# Allegro board PBPRE.brd
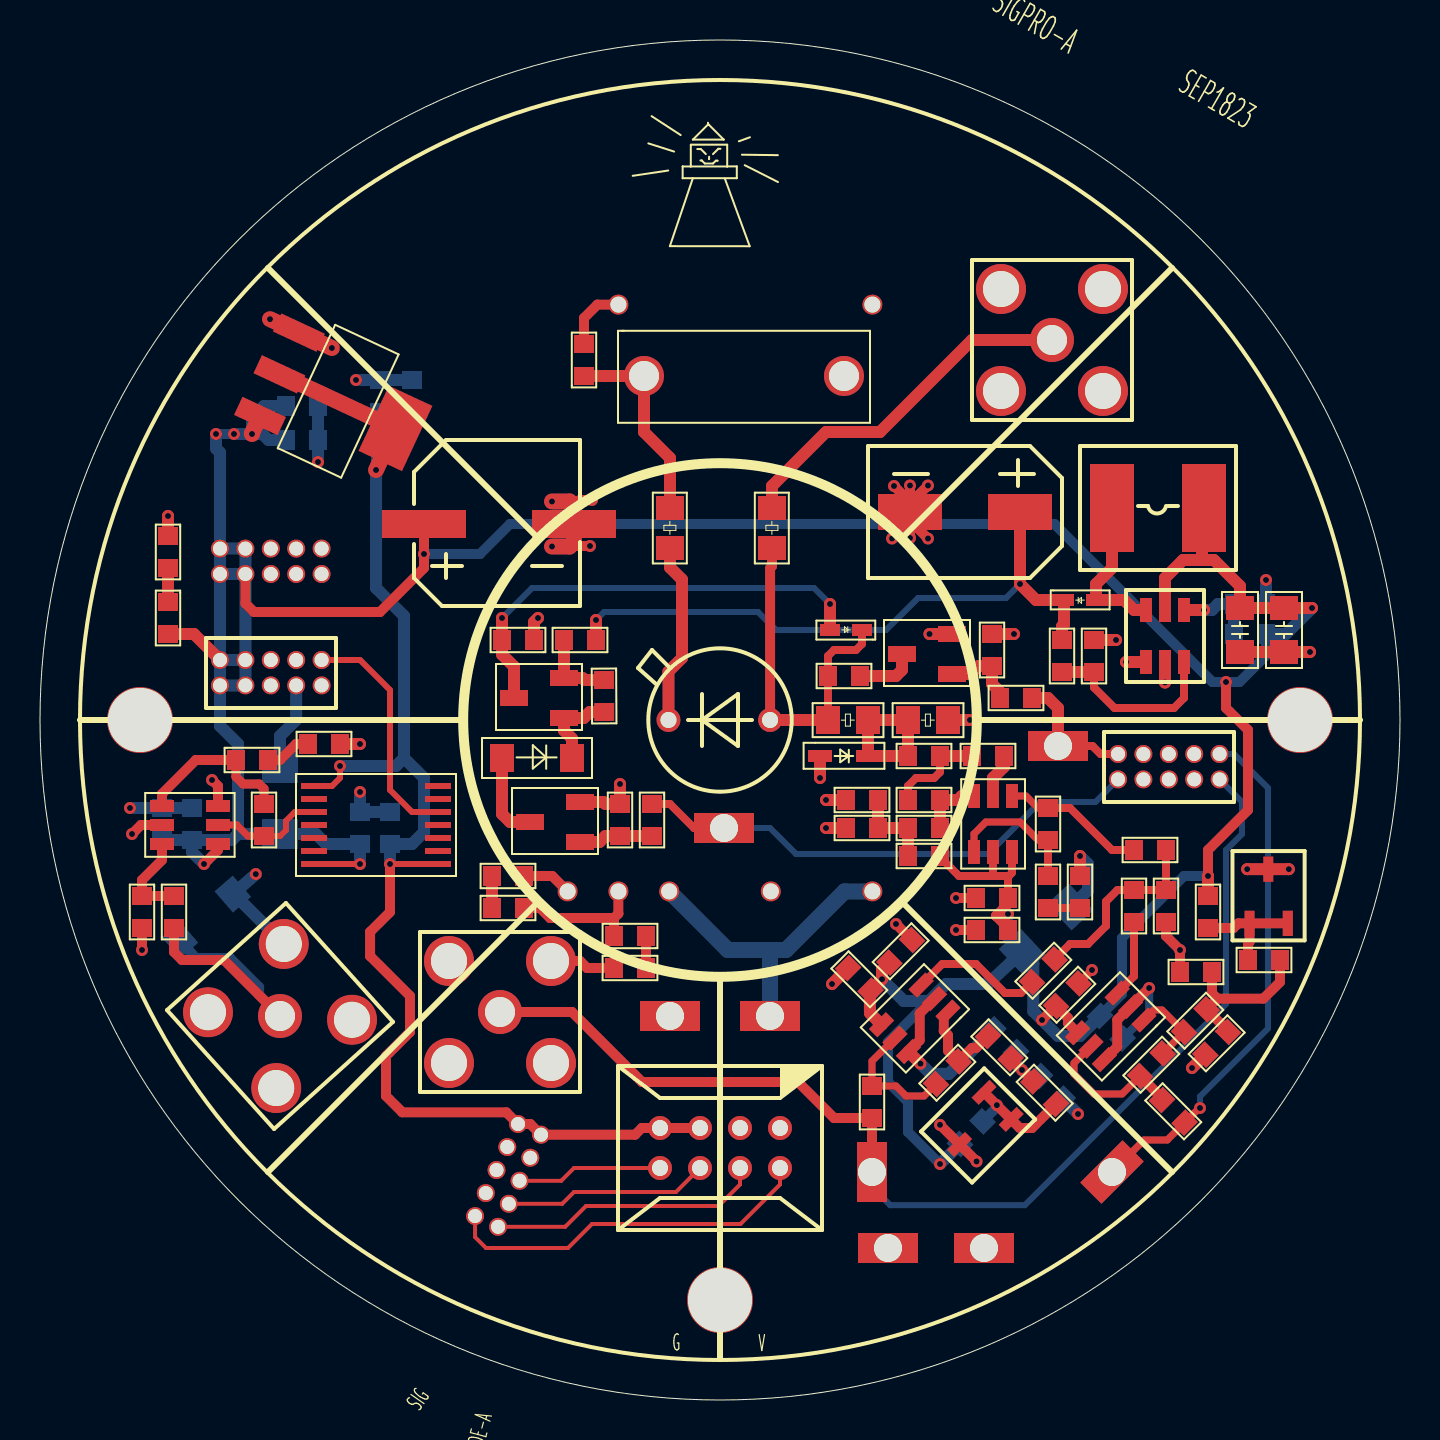
[diagram p0: board, top side]
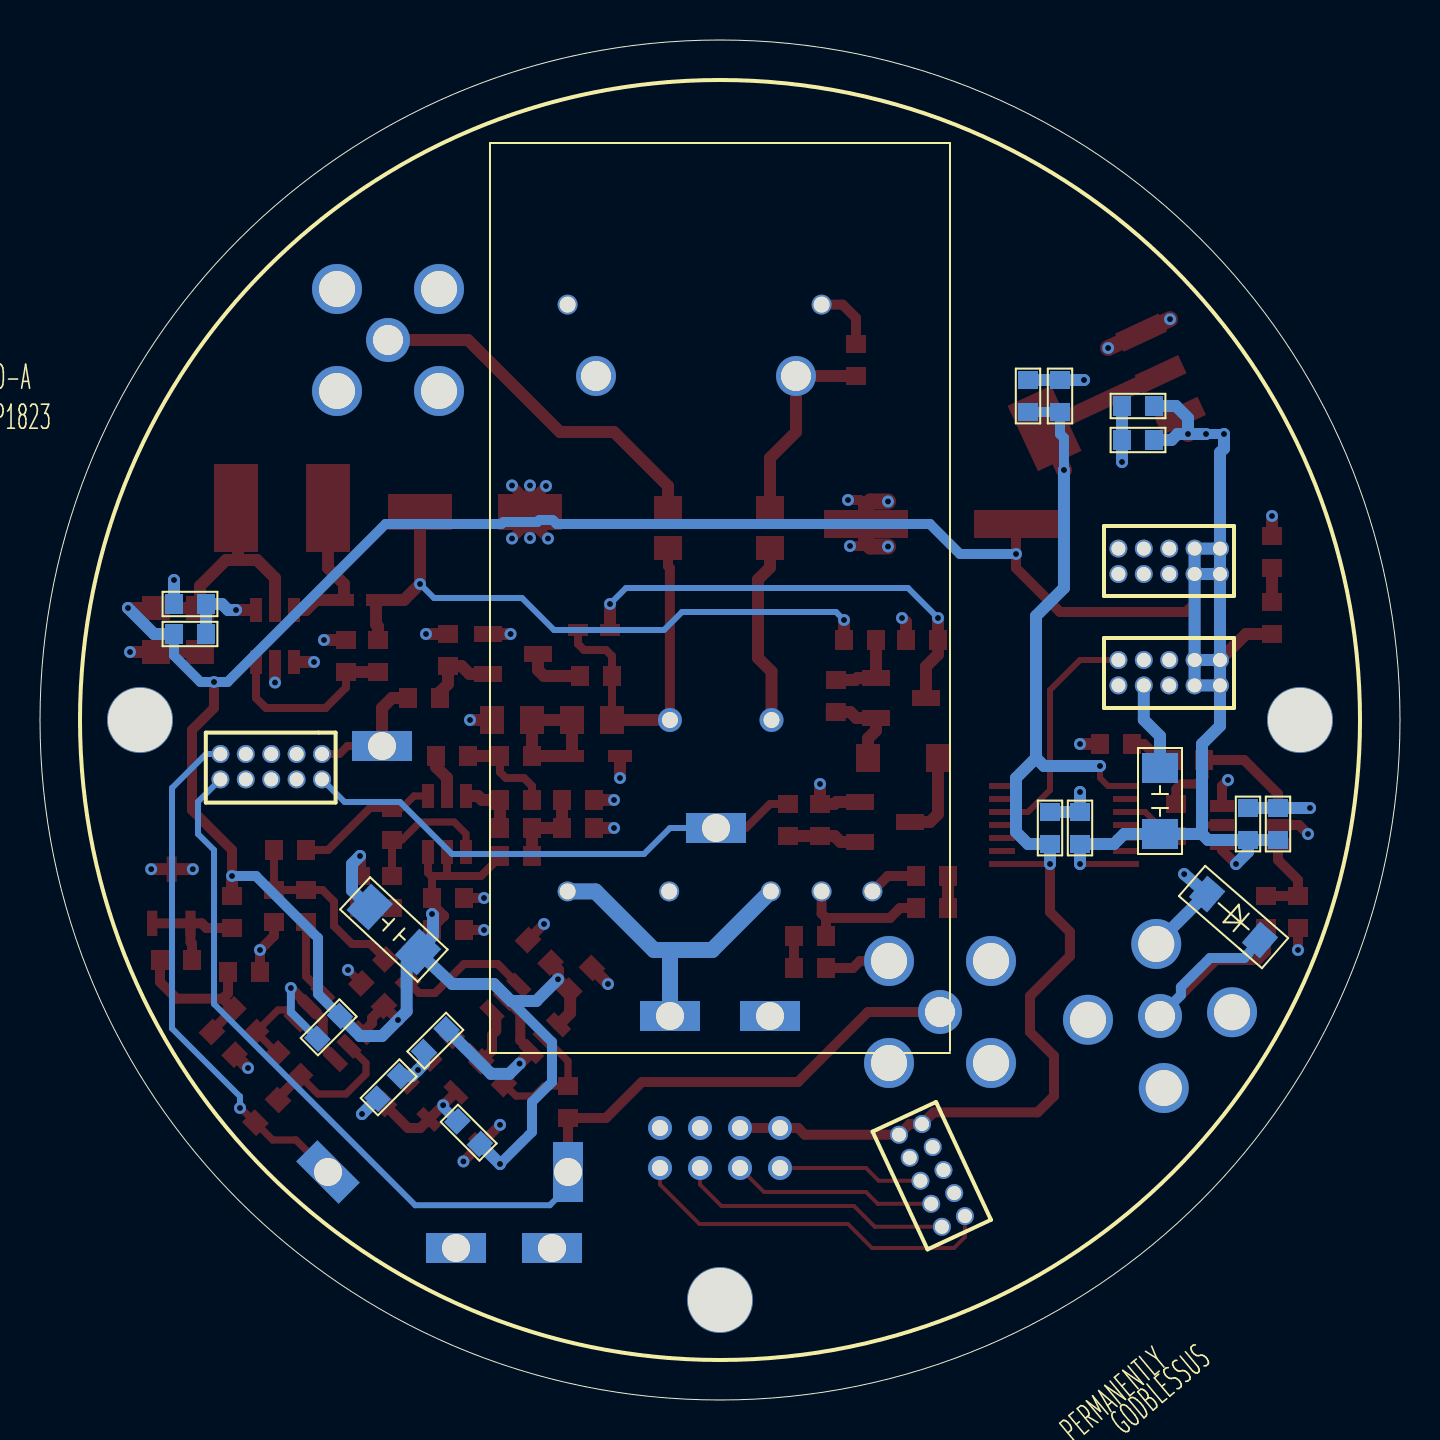
[diagram p1: board, bottom side, seen from below]

Outline 68 x 68 mm; copper layers: TOP, BOTTOM. Coordinates in mm from the lower left corner of the outline.
Outline path: circle c34,34 r34

## Design rules (mm)
constraint set DEFAULT: min track width 0.152, pair gap 0.152

## Placement (name value [footprint] x y rotation side)
C7  10uF/35V  [C0805]  60 39.6 270 top
C8  10uF/35V  [C0805]  62.2 39.6 270 top
C9  220uF/35V  [CAP-SMD-D8D0-L8D3-W8D3-P7D5]  19.2 43.8 0 top
C10  10uF/16V  [C0603]  43.6 23 225 top
C11  0.1uF/16V  [C0603]  45 32.2 180 top
C12  0.1uF/16V  [C0603]  45 30 180 top
C13  0.1uF/16V  [C0603]  48.8 17.4 135 bottom
C14  0.1uF/16V  [C0603]  40.4 21.6 315 top
C15  0.1uF/16V  [C0603]  41.9 30 180 top
C16  0.1uF/16V  [C0603]  52 24.6 90 top
C17  0.1uF/16V  [C0603]  48.4 25.1 180 top
C18  10uF/16V  [C0603]  48.4 23.5 180 top
C19  0.1uF/16V  [C0603]  56.3 27.5 180 top
C20  0.1uF/16V  [C0603]  53 19.2 315 bottom
C21  100uF/35V  [CAP-SMD-L6D6-W6D6-P5D5-MM]  49 44.4 180 top
C22  10uF/16V  [C0603]  50.8 19.7 45 top
C23  0.1uF/16V  [C0603]  59.4 18.4 225 top
C24  0.1uF/630V  [MPP472J630V]  30.2 51.2 0 top
C25  10uF/16V  [C0603]  6.1 29.6 270 bottom
C26  0.1uF/16V  [C0603]  7.6 29.6 270 bottom
C27  10uF/16V  [C0603]  12.3 49.7 0 bottom
C28  0.1uF/16V  [C0603]  12.3 48 0 bottom
C29  10uF/16V  [C0603]  17 51 270 bottom
C30  0.1uF/16V  [C0603]  18.6 51 270 bottom
C64  0.1uF/16V  [C0603]  17.5 29.4 270 bottom
C65  0.1uF/16V  [C0603]  16 27.8 90 bottom
C66  22uF/10V  [C1206]  49.1 22.4 43 bottom
C67  22uF/10V  [C1206]  12 28.3 90 bottom
D2  LED  [R0603]  6.4 43.2 270 top
D3  SAPD  [SAPD-THR-2P]  34 34 180 top
D4  PTVSLC3D3V3B  [SOD323-L1D8-W1D3-P2D4-MM]  39 32.2 0 top
D5  BAS521-7  [SOD-523-L1D2-W0D8-P1D6-MM]  51.2 40 0 top
D6  BAS521-7  [SOD-523-L1D2-W0D8-P1D6-MM]  41.1 38.5 180 top
D7  MMSZ12T1G  [SOD-123-L2D8-W1D8-P3D5-MM]  26.6 32.1 180 top
D8  BAS521-7  [SOD-123-L2D8-W1D8-P3D5-MM]  7 23 41 bottom
J1  Conn-2x5  [CONN-2X5-1D27]  9 37 0 top
J2  Conn-2x5  [CONN-2X5-1D27]  53.9 32.3 0 top
J3  Conn-2x5  [CONN-2X5-1D27]  9 41.3 0 bottom
J4  Conn-2x5  [CONN-2X5-1D27]  23.9 13.8 245 bottom
J7  SMA  [SMA-THR-4P]  50.6 53 0 top
J8  SMA  [SMA-THR-4P]  12 19.2 312 top
J9  PHB-2.0mm-2x4P-Male  [PHB-2D0MM-2X4P]  37 11.6 180 top
J10  SMA  [SMA-THR-4P]  23 19.4 90 top
L3  47uH/1A  [IND-SMD-L5D0-W5D0-P4D6-MM]  58.2 44.6 180 top
NOREF  -  []  15.5 39.85 90 top
NOREF#2  -  []  3.87 44.79 0 top
NOREF#3  -  []  27.95 51.2 0 top
NOREF#4  -  [unnamed#2]  5 34 0 top
NOREF#5  -  []  1.06 42.42 0 top
NOREF#6  -  [unnamed#2]  63 34 0 top
NOREF#7  -  [unnamed#2]  34 5 0 top
NOREF#8  -  []  19.2 43.8 0 top
NOREF#9  -  []  5 34 0 top
Q2  FH3400C  [SOT-23-3-L2D9-W1D3-P1D9-MM]  45.6 38.3 0 top
Q3  AO3401A  [SOT-23-3-L2D9-W1D3-P1D9-MM]  26.2 36.1 0 top
Q4  FH3400C  [SOT-23-3-L2D9-W1D3-P1D9-MM]  27 29.9 0 top
R8  2K  [R0603]  6.4 39.9 270 top
R11  100K  [R0805]  31.5 42.6 90 top
R13  10K  [R0603]  61.3 38.3 180 bottom
R14  DNP  [R0603]  61.3 39.8 180 bottom
R15  0  [R0805]  41.4 34 180 top
R16  0  [R0603]  41 36.2 180 top
R17  1.3K  [R0805]  45.4 34 180 top
R18  499  [R0603]  46 12.8 45 bottom
R19  10K  [R0603]  52.7 36.4 90 top
R20  4.99K  [R0603]  50 16.2 315 bottom
R21  DNP  [R0603]  44.8 15.8 45 top
R22  10K  [R0603]  50.8 14.8 135 top
R23  100  [R0603]  49.6 35.1 180 top
R24  100K  [R0603]  46.6 32.2 0 top
R25  182K  [R0603]  51.1 38 270 top
R26  100K  [R0603]  45 28.6 180 top
R27  1K  [R0603]  47.4 18.2 315 top
R28  1K  [R0603]  47.6 36.7 90 top
R29  100K  [R0603]  50.4 29.6 270 top
R30  1K  [R0603]  41.6 15.7 270 top
R31  1M  [R0603]  24.7 38 180 top
R32  10K  [R0603]  50.4 24.6 90 top
R33  0  [R0603]  49.6 20.9 45 top
R34  4.99K  [R0603]  40.3 28.6 0 top
R35  4.99K  [R0603]  43.4 27.2 0 top
R36  100  [R0603]  30.6 29.8 270 top
R37  100K  [R0603]  56.3 23.9 90 top
R38  1K  [R0603]  29 28.2 90 top
R39  0  [R0603]  54.7 23.9 90 top
R40  499  [R0603]  58.4 25.2 270 top
R41  1K  [R0603]  28.2 36 270.4 top
R42  DNP  [R0603]  55 16.2 45 top
R43  1K  [R0603]  57.2 18.4 45 top
R44  4.99K  [R0603]  58.6 21.4 180 top
R45  4.99K  [R0603]  60.4 22 0 top
R46  1K  [R0603]  56.1 15 314.9 top
R47  0  [R0603]  26.2 38 0 top
R48  0  [R0603]  24.2 26.2 180 top
R50  2K  [R0603]  27.2 51.2 90 top
R51  2.4K  [R0603]  22.6 24.6 0 top
R53  9.1K  [R0603]  30.3 23.2 180 top
R54  0  [R0603]  28.7 21.6 0 top
R55  0  [R0805]  36.6 42.6 90 top
R58  50  [R0603]  6.7 23.6 90 top
R59  50  [R0603]  5.1 25.2 270 top
R60  0  [R0603]  9.8 32 0 top
R61  0  [R0603]  13.4 32.8 0 top
R62  DNP  [R0603]  11.2 28.2 90 top
TP4  RESET  [STAMP_HOLE_1D5X3D0_1D4]  50.9 32.7 90 top
TP5  QUENCH  [STAMP_HOLE_1D5X3D0_1D4]  34.2 28.6 90 top
TP6  PULSE2  [STAMP_HOLE_1D5X3D0_1D4]  41.6 11.4 0 top
TP7  PULSE  [STAMP_HOLE_1D5X3D0_1D4]  53.6 11.4 315 top
TP8  12V  [STAMP_HOLE_1D5X3D0_1D4]  36.5 19.2 270 top
TP9  12V  [STAMP_HOLE_1D5X3D0_1D4]  31.5 19.2 270 top
TP10  PULSE  [STAMP_HOLE_1D5X3D0_1D4]  42.4 7.6 90 top
TP11  PULSE  [STAMP_HOLE_1D5X3D0_1D4]  47.2 7.6 90 top
U2  MAX5026EUT-T  [SOT23-6]  56.2 38.2 0 top
U3  TL431  [SOT-23-3-TL431]  49.2 14 135 top
U4  TLV3501AIDBVR  [SOT-23-6-L2D9-W1D6-PD0D95-CD2D8-MM]  45.4 19.4 225 top
U5  OPA357AIDBVR  [SOT-23-6-L2D9-W1D6-PD0D95-CD2D8-MM]  48.6 30.2 270 top
U6  TL431  [SOT-23-3-TL431]  60 23.4 0 top
U7  TLV3501AIDBVR  [SOT-23-6-L2D9-W1D6-PD0D95-CD2D8-MM]  55.2 19 225 top
U8  -  [H01-P401V-5C]  34 40.1 90 bottom
U9  TLV3501AIDBVR  [SOT-23-6-L2D9-W1D6-PD0D95-CD2D8-MM]  6.1 29.7 0 top
U10  AMS-1117-3.3V  [SOT-223-3]  11 49.2 155 top
U11  LSF0204PW-Q100J  [TSSOP-14]  19.9 26.8 180 top

## Library data of the parts
C7 C8 C10-C20 C22 C23 C25-C30 C64 C65 = CAP NP
C9 C21 C24 C66 C67 = C
D2 = LED
D3 D5 D6 = DIODE
D4 = DIODE SCHOTTKY
D7 D8 = DIODE ZENER
J1-J4 = Conn-2x5
J7 J8 J10 = SMA
J9 = CONNECTOR
L3 = INDUCTOR
Q2 Q4 = FH3400C
Q3 = BSP316P_0
R8 R11 R13-R48 R50 R51 R53-R55 R58-R62 = R
TP4-TP11 = T POINT F
U2 = MAX5026EUT-T
U3 U6 = TL431/TI
U4 U7 U9 = TLV3501AIDBVR
U5 = OPA357AIDBVR
U8 = H01-P401V-5C
U10 = AMS-1117-3.3V
U11 = LSF0204PW-Q100J

## Footprints (pads in the part's own frame, mm; a bottom-side part is the same pattern mirrored in y, then rotated)
C0603
  rect 0.9x1 smd: 1(0,0) 2(1.6,0)
C0805
  rect 1.2x1.4 smd: 1(0,0) 2(2.2,0)
C1206
  rect 1.5x1.8 smd: 1(0,0) 2(3.3,0)
CAP-SMD-D8D0-L8D3-W8D3-P7D5
  rect 4.2x1.4 smd: 1(0,0) 2(7.5,0)
CAP-SMD-L6D6-W6D6-P5D5-MM
  rect 3.2x1.8 smd: 1(0,0) 2(5.5,0)
CONN-2X5-1D27
  round 0.9 hole 0.7: 1(0,0) 2(0,-1.27) 3(1.27,0) 4(1.27,-1.27) 5(2.54,0) 6(2.54,-1.27) 7(3.81,0) 8(3.81,-1.27) 9(5.08,0) 10(5.08,-1.27)
H01-P401V-5C
  round 1 hole 0.8: 1(-14.67,7.62) 2(-14.67,2.54) 3(-14.67,-2.54) 4(-14.67,-5.08) 5(-14.67,-7.62) 6(14.67,-5.08) 7(14.67,7.62)
IND-SMD-L5D0-W5D0-P4D6-MM
  rect 2.2x4.4 smd: 1(0,0) 2(4.6,0)
MPP472J630V
  round 2 hole 1.5: 1(0,0) 2(10,0)
PHB-2D0MM-2X4P
  round 1.2 hole 0.8: 1(0,-2) 2(0,0) 3(2,-2) 4(2,0) 5(4,-2) 6(4,0) 7(6,-2) 8(6,0)
R0603
  rect 0.9x1 smd: 1(0,0) 2(1.6,0)
R0805
  rect 1.2x1.4 smd: 1(0,0) 2(2,0)
SAPD-THR-2P
  round 1.2 hole 0.8: 1(2.576,0) 2(-2.504,0)
SMA-THR-4P
  round 2.5 hole 1.8: 1(-2.55,2.55) 2(2.55,2.55) 3(-2.55,-2.55) 4(2.55,-2.55)
  round 2.2 hole 1.5: 5(0,0)
SOD323-L1D8-W1D3-P2D4-MM
  rect 1.2x0.6 smd: 1(0,0) 2(2.4,0)
SOD-123-L2D8-W1D8-P3D5-MM
  rect 1.2x1.4 smd: 1(0,0) 2(3.5,0)
SOD-523-L1D2-W0D8-P1D6-MM
  rect 1x0.6 smd: 1(0,0) 2(1.6,0)
SOT23-6
  rect 0.6x1.2 smd: 1(-0.9,-1.3) 2(0.05,-1.3) 3(1,-1.3) 4(1,1.3) 5(0.05,1.3) 6(-0.9,1.3)
SOT-23-3-L2D9-W1D3-P1D9-MM
  rect 1.4x0.8 smd: 1(0,-2) 2(0,0) 3(-2.5,-1)
SOT-23-3-TL431
  rect 0.51x1.27 smd: 1(0.476,0.434) 2(1.415,3.142) 3(2.391,0.434)
SOT-23-6-L2D9-W1D6-PD0D95-CD2D8-MM
  rect 1.2x0.6 smd: 1(0,0) 2(0,-0.95) 3(0,-1.9) 4(2.8,-1.9) 5(2.8,-0.95) 6(2.8,0)
SOT-223-3
  rect 2.4x1 smd: 1(0,-4.6) 2(0,-2.3) 3(0,0)
  rect 2.4x3.6 smd: 4(-6.4,-2.3)
STAMP_HOLE_1D5X3D0_1D4
  rect 1.5x3 hole 1.4: 1(0,0)
TSSOP-14
  rect 1.3x0.3 smd: 1(0,0) 2(0,-0.65) 3(0,-1.3) 4(0,-1.95) 5(0,-2.6) 6(0,-3.25) 7(0,-3.9) 8(6.2,-3.9) 9(6.2,-3.25) 10(6.2,-2.6) 11(6.2,-1.95) 12(6.2,-1.3) 13(6.2,-0.65) 14(6.2,0)
unnamed#2
  round 3.3 hole 3.2 unplated: (0,0)

## Nets
2V5: R48.1 U8.5(VREF)
GND: C7.2 C8.2 C9.2 C10.1 C13.2 C14.1 C15.2 C16.2 C17.2 C18.2 C20.2 C21.2 C22.2 C23.2 C24.2 C25.1 C26.1 C27.2 C28.2 C29.1 C30.1 C64.1 C65.2 C66.2 C67.2 D2.1(CATHODE) D4.1 D8.2 J1.5 J1.6 J1.7 J1.8 J3.7 J3.8 J3.9 J3.10 J4.3 J4.4 J7.1 J7.2 J7.3 J7.4 J8.1 J8.2 J8.3 J8.4 J9.1 J9.3 J10.1 J10.2 J10.3 J10.4 Q2.2(S) Q4.2(S) R14.1 R17.1 R19.2 R20.2 R24.2 R28.2 R31.1 R34.1 R37.1 R38.2 R44.2 R54.1 R59.2 R61.2 TP9.1(TP) TP10.1(TP) TP11.1(TP) U2.1 U2.2 U3.2 U4.2(V-) U4.6 U5.2(V-) U6.2 U7.2(V-) U7.6 U8.2 U8.7 U9.2(V-) U9.6 U10.1 U11.7 U11.11 U11.12 U11.13
VDD5: C7.1 C8.1 C9.1 C10.2 C14.2 C17.1 C18.1 C20.1 C22.1 C25.2 C26.2 C27.1 C28.1 C65.1 C66.1 C67.1 J1.1 J1.2 J1.3 J1.4 J3.1 J3.2 J3.3 J3.4 L3.1 R8.2 R13.1 R18.1 R35.2 R40.1 U2.5(VCC) U4.4 U5.5 U5.6 U7.4 U9.4 U10.3 U11.14(REFB)
VDD12: TP8.1(TP) U8.1 U8.3
VDD33: C29.2 C30.2 C64.2 J4.1 J4.2 J9.5 J9.7 U10.2 U10.4(VOUT#4) U11.1 U11.8
IO_A2: J4.5
IO_A3: J4.7
IO_A4: J4.9 J9.2
IO_H1: J4.6 J9.8
IO_J1: J4.10 J9.4
IO_J2: J4.8 J9.6
PULSE: J2.9 R46.2 TP7.1(TP)
PULSE2: J2.10 J10.5 R30.2 TP6.1(TP)
QUENCH_VOLTAGE_DOWN: J2.2 R36.1 TP5.1(TP)
RESET_DISCHARGE: J2.1 R23.1 TP4.1(TP)
VBIAS: C24.1 R11.2 R50.1
VQUENCH: C21.1 D5.1(K) R25.1 R47.2
ZERO_CROSS: R62.1 U9.5 U11.10
ZERO_CROSS_3V3: J1.9 U11.5
N365393: D5.2 L3.2 U2.6
N365573: R13.2 R14.2 U2.4
N365581: R19.1 R25.2 U2.3
N370892: Q3.2(S) R41.1 R47.1
N370992: D7.1(CATHODE) Q3.1 R41.2
N371048: D7.2 Q4.3
N371052: D3.2 D6.1(K) R15.2 R16.2 R55.1
N371122: D6.2 Q3.3 R31.2
N371190: Q4.1 R36.2 R38.1
N371268: C11.2 D4.2(CATHODE) R15.1 R17.2
N371272: Q2.3 R16.1
N371414: Q2.1 R23.2 R28.1
N371666: C11.1 C12.2 R24.1
N371936: R42.1 R46.1 U7.5
N371974: C23.1 R43.2 R44.1 R45.2
N372070: R40.2 R45.1 U6.1(REF) U6.3
N379806: C15.1 R26.2 R34.2 R35.1
N380805: C12.1 R26.1 U5.3
N381019: R29.2 R32.2 U5.4
N381074: C19.2 R29.1 U5.1
N381200: C16.1 R32.1
N382559: C19.1 R33.2 R37.2 R39.2
N382943: D3.1(K) R11.1
N497700: R42.2 R43.1 U7.1
N497855: R39.1 U7.3
N499181: R21.2 R27.1 U4.1
N499185: R21.1 R30.1 U4.5
N500750: C13.1 R20.1 R22.2 R27.2
N500844: R18.2 R22.1 U3.1(REF) U3.3
N502146: R33.1 U4.3
N518424: R51.2 R53.2 U8.4
N518432: R50.2 U8.6
N518512: R48.2 R51.1
N518576: R53.1 R54.2
N519694: D2.2 R8.1
N520234: J7.5 R55.2
N523027: R58.2 R59.1 U9.3
N523749: D8.1(CATHODE) J8.5 R58.1
N533450: R60.2 R61.1
N533543: R60.1 R62.2 U9.1

Pads without a net: J1 10; J2 3 4 5 6 7 8; J3 5 6; U11 2 3 4 6 9

## Via types
v1: diameter 0.6, hole 0.3, TOP to BOTTOM, 74 vias

## Routing (per net, layer and track width the routed paths; a pad name or vN(x,y) marks a point on that pad's centre or on a via; arc(x,y) is an arc through that point)
2V5: length 2.5
  TOP w0.5: R48.1 25.61,26.2 U8.5
GND: length 103.3
  TOP w0.152: 43.5,44.83 43.5,44.9
  TOP w0.4: C22.2 v1(52.6,21.5)
  TOP w0.5: C17.2 v1(45.8,25.1) ; 43.5,43.97 v1(44.4,43.07) ; 43.5,43.97 C21.2 43.5,44.83 v1(44.4,45.73) ; 43.5,43.97 v1(42.6,43.07) ; 43.5,43.97 v1(43.5,43.1) ; U4.6 43.99,17.99 43.99,19.33 U4.2 ; R59.2 v1(5.1,22.5) ; R54.1 27.35,21.6 27,21.95 J10.4 ; v1(27.5,42.7) 26.9,42.7 26.7,42.9 ; v1(46.83,11.93) U3.2 v1(45,13.76) ; v1(4.6,28.3) 5.05,28.75 U9.2 ; v1(8.6,31) 8.9,30.7 U9.6 ; R37.1 56.3,23.2 v1(57,22.5) R44.2 ; U7.6 53.86,17.66 53.86,19.01 U7.2 v1(55.46,20.6) ; v1(43.5,45.73) 43.5,44.9 v1(42.7,45.7) ; C18.2 v1(45.8,23.5) ; C10.1 v1(42.8,23.8) ; v1(27.6,45) 27,45 26.7,44.7
  TOP w0.6: v1(62.44,26.54) U6.2 v1(60.36,26.54) ; R17.1 v1(46.5,34) ; C14.1 v1(39.6,20.8) ; v1(29,30.8) R38.2 28.27,29.8 28.17,29.9 Q4.2 ; D2.1 v1(6.4,44.2) ; C7.2 C8.2 v1(63.5,37.4) ; R19.2 v1(53.8,38) ; U2.2 v1(56.25,35.87) ; C16.2 v1(52,27.2) ; U2.1 v1(54.3,36.9) ; D4.1 v1(39,31.1) ; R61.2 v1(16,32.8) ; Q2.2 v1(44.47,38.3) ; R28.2 v1(48.7,38.3) ; C23.2 v1(57.6,16.6) ; C15.2 v1(39.3,30) ; R31.1 24.7,38.9 v1(24.9,39.1) ; R34.1 v1(39.3,28.6) ; U4.6 v1(44.02,16.82) ; R24.2 48.2,31.66 47.65,31.11 U5.2
  TOP w0.8: v1(11.5,54.04) 12.94,53.37 v1(14.59,52.6) ; v1(25.6,42.67) 26.48,42.67 26.7,42.9 C9.2 26.7,44.7 26.48,44.93 v1(25.6,44.93)
  BOTTOM w0.4: C20.2 55.46,19.39 v1(55.46,20.6)
  BOTTOM w0.6: R14.1 v1(61.3,41) ; C13.2 45.44,16.31 44.53,16.31 v1(44.02,16.82) ; J1.8 12.81,34.01 12,33.2 C67.2 ; C64.1 C65.2 v1(16,30.4) ; C30.1 C29.1 v1(15.8,51) ; C66.2 52.4,25.48 52.4,26.8 v1(52,27.2) ; R20.2 v1(51.9,14.3) ; v1(4.5,29.6) C25.1 C26.1 ; C27.2 C28.2 v1(13.9,46.9) ; v1(10.79,26.3) D8.2 9.69,25.3 J8.1
VDD5: length 205.3
  TOP w0.3: v1(16,26.8) U11.14
  TOP w0.4: 47.65,26.2 45.95,26.2 45,27.15 R35.2 ; 47.65,26.2 U5.5 ; 47.65,26.2 48.44,26.2 ; 48.44,26.2 48.4,26.16 C17.1 ; 48.44,26.2 48.6,26.36 U5.6
  TOP w0.5: 47.8,24.2 48.3,24.2 v1(48.4,24.3) ; 47.8,24.2 48.4,23.6 C18.1 ; 47.8,24.2 48.4,24.8 C17.1 ; J3.3 10.27,39.83 10.7,39.4 17,39.4 19.2,41.6 v1(19.2,42.3) C9.1 ; v1(8.2,26.8) 8.9,27.5 U9.4 ; U7.4 51.4,18.84 51.4,19.1 C22.1 v1(50.1,19) ; v1(58.4,26.2) 58.4,27.5 60.4,29.5 60.4,33.5 59.3,34.6 v1(59.3,35.9)
  TOP w0.6: U2.5 56.25,41.1 57.15,42 58.1,42 ; C10.2 42.1,21.5 v1(42.1,21.04) C14.2 41.5,20.43 41.5,19.49 41.5,19.49 41.5,19.34 U4.4 ; 58.1,42 58.7,42 60,40.7 C7.1 C8.1 v1(63.6,39.6) ; 58.1,42 58.1,44.5 L3.1 ; R8.2 7.7,38.3 J1.1 ; R40.1 v1(58.4,26.2)
  TOP w0.8: U10.3 10.59,48.32 v1(10.6,48.3)
  BOTTOM w0.5: v1(9.7,48.3) v1(8.8,48.3) ; R13.1 61.3,37.22 59.98,35.9 v1(59.3,35.9) 58.62,35.9 50.72,43.8 44.93,43.8 44.83,43.9 43.13,43.9 43.03,44 42.37,44 42.17,43.8 23.5,43.8 22,42.3 v1(19.2,42.3) ; v1(58.4,26.2) 57.2,26.2 54.1,23.1 54.1,20.3 C20.1 ; 44.45,19.95 42.4,17.9 42.4,15.9 43.4,14.9 43.4,13.4 v1(45,11.8)
  BOTTOM w0.6: J3.2 9,47.37 8.8,47.57 v1(8.8,48.3) ; J3.2 J3.1 ; J3.2 J3.4 J3.3 ; J1.3 J1.1 ; J1.3 J1.4 J1.2 ; J1.3 J3.3 ; J1.1 J1.2 ; J1.1 J3.1 ; v1(63.6,39.6) 62.3,38.3 R13.1 ; v1(8.2,26.8) 7.6,27.4 C26.2 ; J3.1 J3.3 ; 9.9,28.3 C67.1 13.8,28.3 14.3,27.8 C65.1 v1(16,26.8) ; 9.9,28.3 9.9,32.8 9,33.7 J1.2 ; 9.9,28.3 9.6,28 C26.2 ; C66.1 47.38,20.8 45.3,20.8 44.45,19.95 43.19,19.95 v1(42.1,21.04) ; C66.1 48.35,23.21 48.35,24.25 v1(48.4,24.3) ; C66.1 49.67,21.83 49.67,19.43 v1(50.1,19) 50.9,18.2 52,18.2 C20.1 ; C25.2 C26.2 ; v1(10.6,48.3) 11.13,48.3 11.43,48 C28.1 ; v1(10.6,48.3) v1(9.7,48.3) ; v1(10.6,48.3) 10.6,49.1 11.2,49.7 C27.1 ; R18.1 v1(45,11.8)
VDD12: length 15.9
  BOTTOM w0.8: 36.5,22.5 TP8.1 ; 36.5,22.5 34.39,22.5 U8.3 ; 36.5,22.5 37.3,22.5 40.23,25.43 U8.1
VDD33: length 73.1
  TOP w0.3: U11.8 14.6,30.7 15,31.1 v1(15,31.7) ; v1(17.5,26.8) U11.1
  TOP w0.5: J9.5 J9.7 30.09,13.6 29.76,13.26 J4.2 24.51,13.8 J4.1 23.32,14.38 18.12,14.38 17.3,15.2 17.3,17.2 18.5,18.4 18.5,20.2 16.5,22.2 16.5,23.4 17.5,24.4 v1(17.5,26.8)
  TOP w0.8: v1(16.8,46.5) U10.4 U10.2
  BOTTOM w0.5: C30.2 C29.2 17,48.3 16.8,48.1 v1(16.8,46.5)
  BOTTOM w0.6: v1(15,31.7) 17.8,31.7 18.2,32.1 ; v1(16.8,46.5) 16.8,40.6 18.2,39.2 18.2,32.1 ; 18.2,32.1 19.2,31.1 19.2,28.4 18.6,27.8 C64.2 v1(17.5,26.8)
IO_A4: length 18.7
  TOP w0.2: J4.9 21.75,8.15 22.3,7.6 26.4,7.6 27.6,8.8 35.03,8.8 37,10.77 J9.2
IO_H1: length 7.3
  TOP w0.2: J9.8 26.7,11.6 26.06,10.96 J4.6
IO_J1: length 13.8
  TOP w0.2: J9.4 35,10.77 33.93,9.7 27.3,9.7 26.26,8.66 J4.10
IO_J2: length 10.3
  TOP w0.2: J4.8 26.11,9.81 26.7,10.4 31.8,10.4 J9.6
PULSE: length 26.3
  TOP w0.36: v1(58,14.6) 57.96,14.6 R46.2 56.36,13 55.2,13 TP7.1
  BOTTOM w0.3: v1(58,14.6) 58,15.18 61.4,18.58 61.4,30.6 59.7,32.3 J2.9
PULSE2: length 58.5
  TOP w0.5: TP6.1 R30.2 39.7,14.1 37.9,15.9 30.1,15.9 26.6,19.4 J10.5
  BOTTOM w0.3: J2.10 60.1,29.91 60.1,28.3 59.3,27.5 59.3,19.8 49.24,9.74 42.51,9.74 41.6,10.65 TP6.1
QUENCH_VOLTAGE_DOWN: length 25.9
  TOP w0.4: R36.1 31.5,29.8 32.7,28.6 TP5.1
  BOTTOM w0.3: TP5.1 36.5,28.6 37.8,27.3 47.4,27.3 50,29.9 52.77,29.9 J2.2
RESET_DISCHARGE: length 6.6
  TOP w0.4: TP4.1 52.63,32.7 53.03,32.3 J2.1
  TOP w0.6: TP4.1 50.9,34.6 50.4,35.1 R23.1
VBIAS: length 10.1
  TOP w0.6: R50.1 C24.1 30.2,48.4 31.5,47.1 R11.2
VQUENCH: length 31.9
  TOP w0.6: R47.2 v1(27.8,39) ; C21.1 v1(49,40.8) 49.8,40 D5.1 51.2,38.78 51.1,38.68 R25.1
  BOTTOM w0.3: v1(49,40.8) 48.3,40.1 43.9,40.1 42.3,38.5 36.8,38.5 35.9,39.4 28.2,39.4 v1(27.8,39)
ZERO_CROSS: length 5.8
  TOP w0.3: R62.1 12.01,28.2 12.3,28.49 12.3,28.96 12.74,29.4 U11.10
  TOP w0.36: U9.5 9.84,28.75 10.39,28.2 R62.1
ZERO_CROSS_3V3: length 11.9
  TOP w0.3: J1.9 16,37 17.5,35.5 17.5,30.5 18.6,29.4 U11.5
N365393: length 7.6
  TOP w0.6: L3.2 53.6,41.6 52.8,40.8 D5.2 54.2,40 54.7,39.5 U2.6
N365573: length 4.1
  TOP w0.6: U2.4 v1(58.2,39.5)
  BOTTOM w0.6: R13.2 R14.2 58.9,39.8 58.6,39.5 v1(58.2,39.5)
N365581: length 9.3
  TOP w0.4: U2.3 57.2,35.1 56.7,34.6 53.72,34.6 52.7,35.62 R19.1
  TOP w0.6: R25.2 R19.1
N370892: length 3.9
  TOP w0.6: R47.1 Q3.2 27.13,36.1 27.23,36 R41.1
N370992: length 4.3
  TOP w0.6: R41.2 27.48,34.4 27.19,34.1 Q3.1 26.2,33.47 26.6,33.07 D7.1
N371048: length 4.4
  TOP w0.6: Q4.3 23.5,28.9 23.1,29.3 D7.2
N371052: length 17.4
  TOP w0.4: D6.1 41.1,37.8 40.8,37.5 39.7,37.5 39.4,37.2 R16.2 R15.2
  TOP w0.5: D3.2 36.5,41.6 36.6,41.69 R55.1
  TOP w0.6: R15.2 D3.2
N371122: length 22.9
  TOP w0.6: Q3.3 23.7,36.67 23.1,37.27 R31.2 v1(23.1,39.1) ; D6.2 v1(39.5,39.8)
  BOTTOM w0.3: v1(23.1,39.1) 24.6,40.6 38.7,40.6 v1(39.5,39.8)
N371190: length 3.7
  TOP w0.6: R36.2 R38.1 28.27,28.2 27.97,27.9 Q4.1
N371268: length 7.6
  TOP w0.6: R15.1 D4.2 C11.2 R17.2 R15.1
N371272: length 3
  TOP w0.6: Q2.3 43.1,36.5 42.8,36.2 R16.1
N371414: length 3.9
  TOP w0.6: Q2.1 46.53,36.3 46.93,36.7 R28.1 47.6,35.8 48,35.4 R23.2
N371666: length 5
  TOP w0.4: C11.1 45,31.39 44.71,31.1 43.8,31.1 43.4,30.7 C12.2
  TOP w0.6: C11.1 R24.1
N371936: length 7.5
  TOP w0.36: R42.1 54.1,15.3 52.7,15.3 51.7,16.3 51.7,16.84 U7.5
  TOP w0.5: R46.1 56.1,15.1 R42.1
N371974: length 8.4
  TOP w0.5: 58.87,20.07 58.6,20.33 R44.1 ; 58.87,20.07 61.17,20.07 62,20.9 R45.2 ; 58.87,20.07 R43.2 59.4,18.46 C23.1
N372070: length 6
  TOP w0.5: U6.1 60.48,22.89 60.4,22.82 R45.1 ; U6.1 U6.3 ; U6.1 59.91,23.83 59.68,23.6 R40.2
N379806: length 4.3
  TOP w0.6: R35.1 R26.2 R34.2 C15.1
N380805: length 3.2
  TOP w0.6: U5.3 46.09,30.2 45.89,30 C12.1 R26.1
N381019: length 7
  TOP w0.36: U5.4 46.7,28.31 47.29,28.9 49,28.9 49.9,28 R29.2
  TOP w0.4: R32.2 R29.2
N381074: length 7.2
  TOP w0.36: U5.1 49.3,30.2 49.9,29.6 R29.1
  TOP w0.4: R29.1 51.5,29.6 53.6,27.5 C19.2
N381200: length 1.6
  TOP w0.4: R32.1 C16.1
N382559: length 9.7
  TOP w0.4: C19.1 R37.2 R39.2 53.87,25.5 53.3,24.93 53.3,23.7 52.4,22.8 51.5,22.8 R33.2
N382943: length 9.1
  TOP w0.6: R11.1 31.5,41.62 32.1,41.02 32.1,37.1 31.42,36.42 D3.1
N497700: length 4.2
  TOP w0.36: R42.2 R43.1 56.1,19.5 55.7,19.5 U7.1
N497855: length 3.9
  TOP w0.4: R39.1 54.7,21.19 U7.3
N499181: length 4.9
  TOP w0.5: U4.1 45.19,19.19 45.19,18.46 45.4,18.24 45.4,17.46 R21.2 46.6,17.6 46.8,17.6 R27.1
N499185: length 6.5
  TOP w0.36: R21.1 44.2,15.2 43.3,15.2 42.8,15.7 R30.1 41.6,16.94 U4.5
N500750: length 3.7
  TOP w0.5: R27.2 v1(49.1,16.5) R22.2
  BOTTOM w0.6: R20.1 49.4,16.2 v1(49.1,16.5) 48.8,16.8 C13.1
N500844: length 5.9
  TOP w0.5: R22.1 49.6,13.6 48.99,13.6 U3.1 v1(47.84,14.74) U3.3
  BOTTOM w0.5: v1(47.84,14.74) 47.84,14.64 R18.2
N502146: length 6.8
  TOP w0.4: U4.3 45.11,21.8 46.8,21.8 48.25,20.35 49.05,20.35 R33.1
N518424: length 7
  TOP w0.5: U8.4 28.92,24.32 28.7,24.1 ; 28.7,24.1 R53.2 ; 28.7,24.1 25.5,24.1 25,24.6 R51.2
N518432: length 3.3
  TOP w0.5: U8.6 27.87,54.77 27.2,54.1 R50.2
N518512: length 1.6
  TOP w0.6: R48.2 R51.1
N518576: length 1.6
  TOP w0.5: R53.1 R54.2
N519694: length 1.7
  TOP w0.6: D2.2 R8.1
N520234: length 18.1
  TOP w0.6: J7.5 46.6,53 42,48.4 39.3,48.4 36.6,45.7 R55.2
N523027: length 4.6
  TOP w0.5: R58.2 R59.1 5.1,26 6.1,27 U9.3
N523749: length 14.7
  TOP w0.5: J8.5 9.2,22 7.1,22 6.7,22.4 R58.1
  BOTTOM w0.5: J8.5 10.96,20.24 10.96,20.64 9.5,22.1 7.78,22.1 D8.1
N533450: length 2.3
  TOP w0.5: R61.1 12.8,32.8 12,32 R60.2
N533543: length 8.3
  TOP w0.46: R62.2 11.2,30.56 10.96,30.8 10.16,30.8 9.8,31.16 R60.1
  TOP w0.5: R60.1 7.79,32 6.1,30.31 U9.1

## Text on the board
Ref Des/Silkscreen Bottom: SEP1823 | PD-SIGPRO-A | GODBLESSUS | PERMANENTLY
Ref Des/Silkscreen Top: G | V | SIG | SIDE-A | PD-SIGPRO-A | SEP1823
XSECTION_CHART: *  SURFACE | L1 TOP CONDUCTOR | *  DIELECTRIC | L2 BOTTOM CONDUCTOR | DESIGN CROSS SECTION CHART | ___________________________ | TOTAL THICKNESS 0.1694 MM | 1-2
NCLEGEND-1-6: FIGURE | FINISHED_SIZE | 0.15 | 0.2 | 0.3 | 0.7 | 1.4 | 3.2 | DRILL CHART: TOP to BOTTOM | ALL UNITS ARE IN MILLIMETERS | PLATED | NON-PLATED | QTY | 185 | 308 | 4 | 40 | 6 | 3
